# Altium PCB esp32门锁.PcbDoc
Units mil, origin at the board's own origin, x right, y up, seen from the top; angles counter-clockwise.
Board outline 1968.27 x 1924.63 mil, 2 copper layers (Top Layer, Bottom Layer); 39 components, 54 nets, 195 pads, 54 vias.
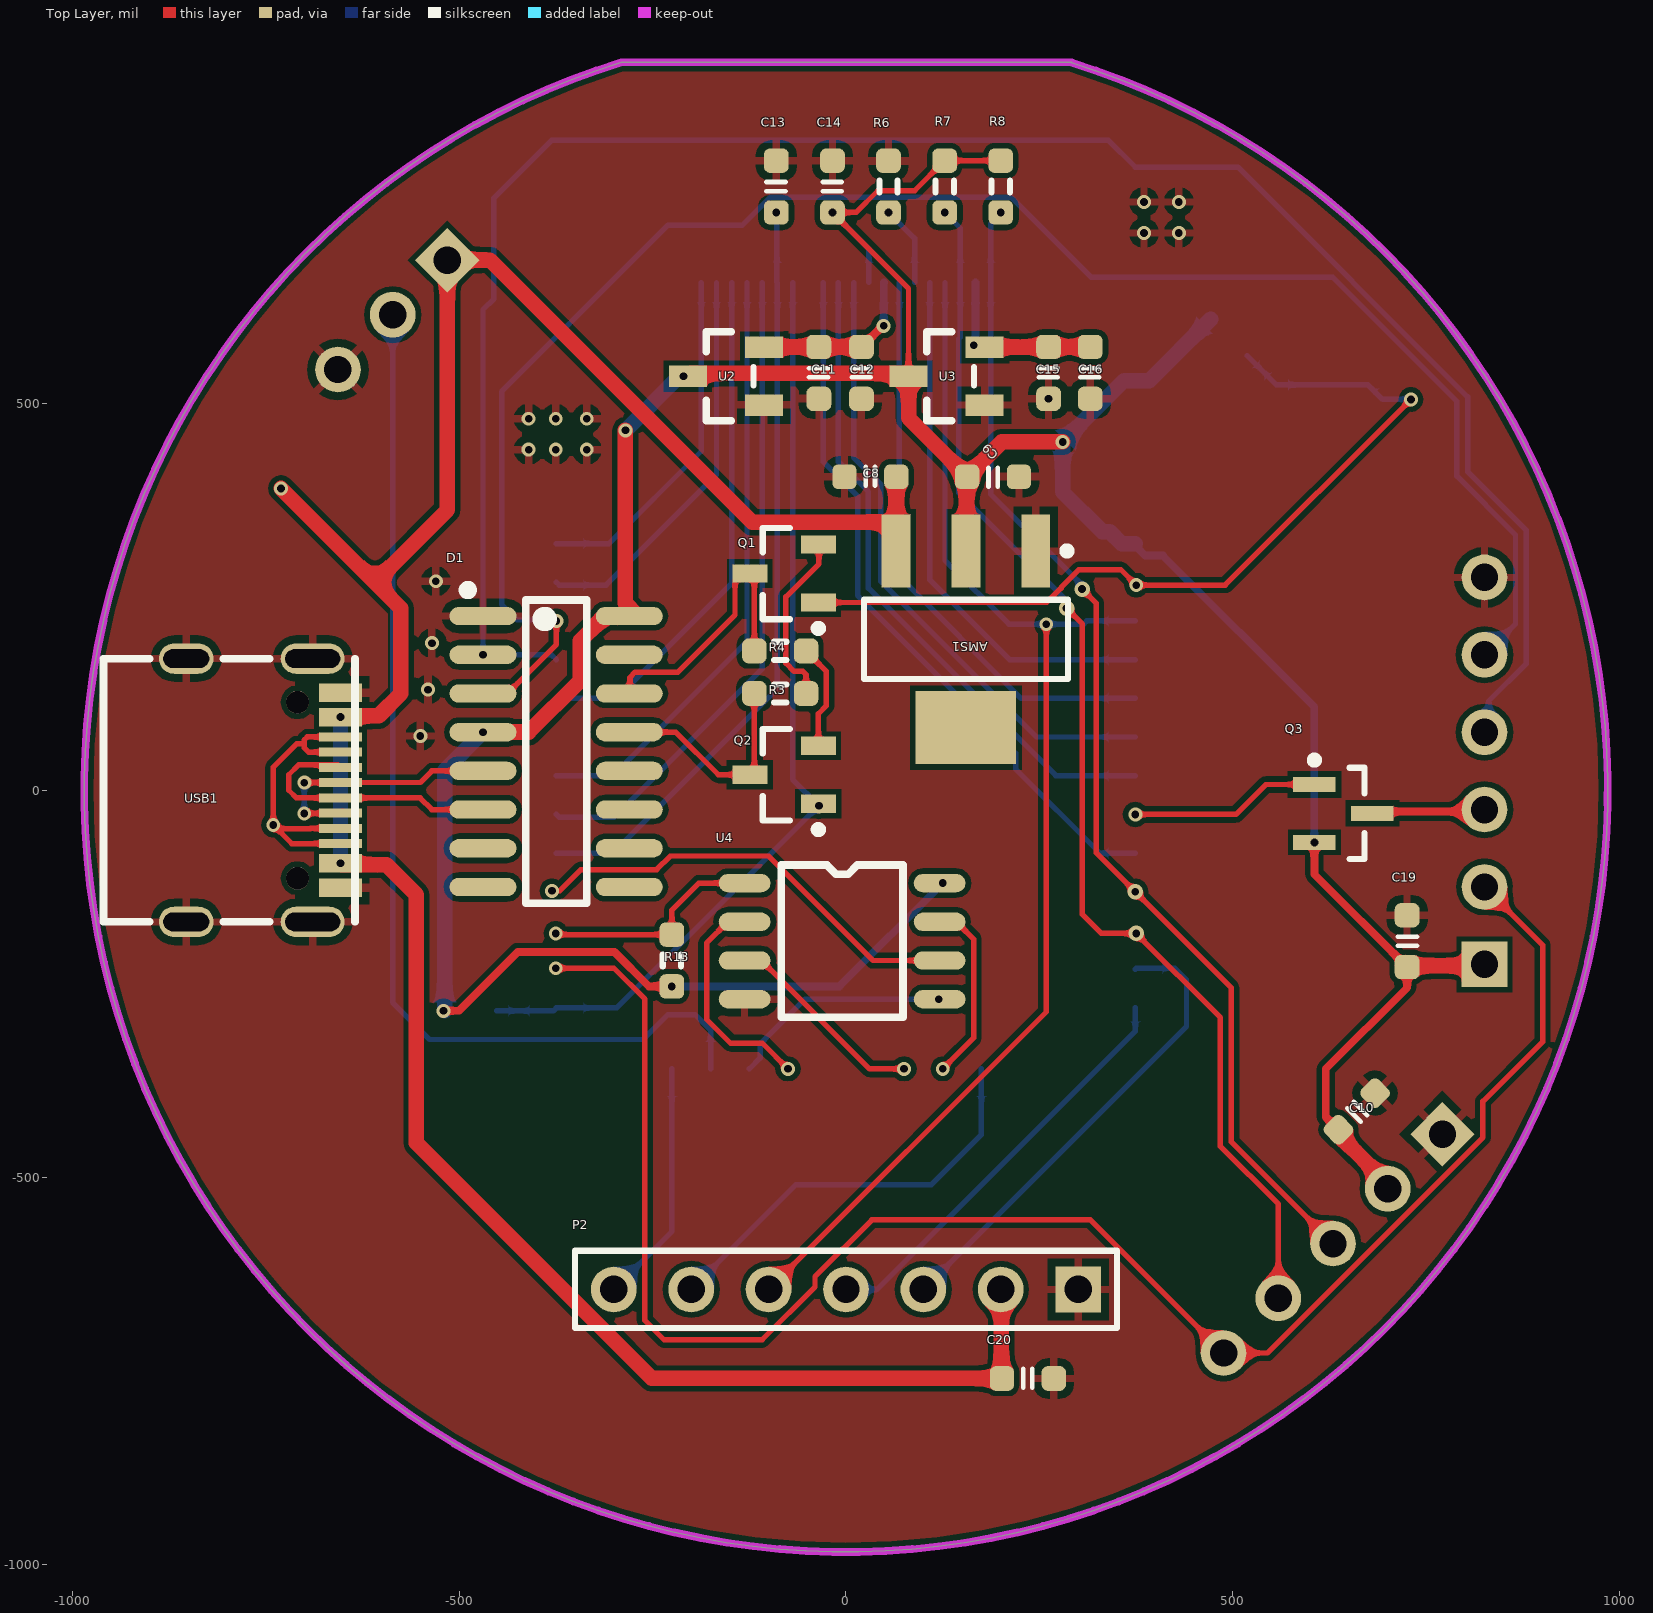
[diagram p0: Top Layer view]
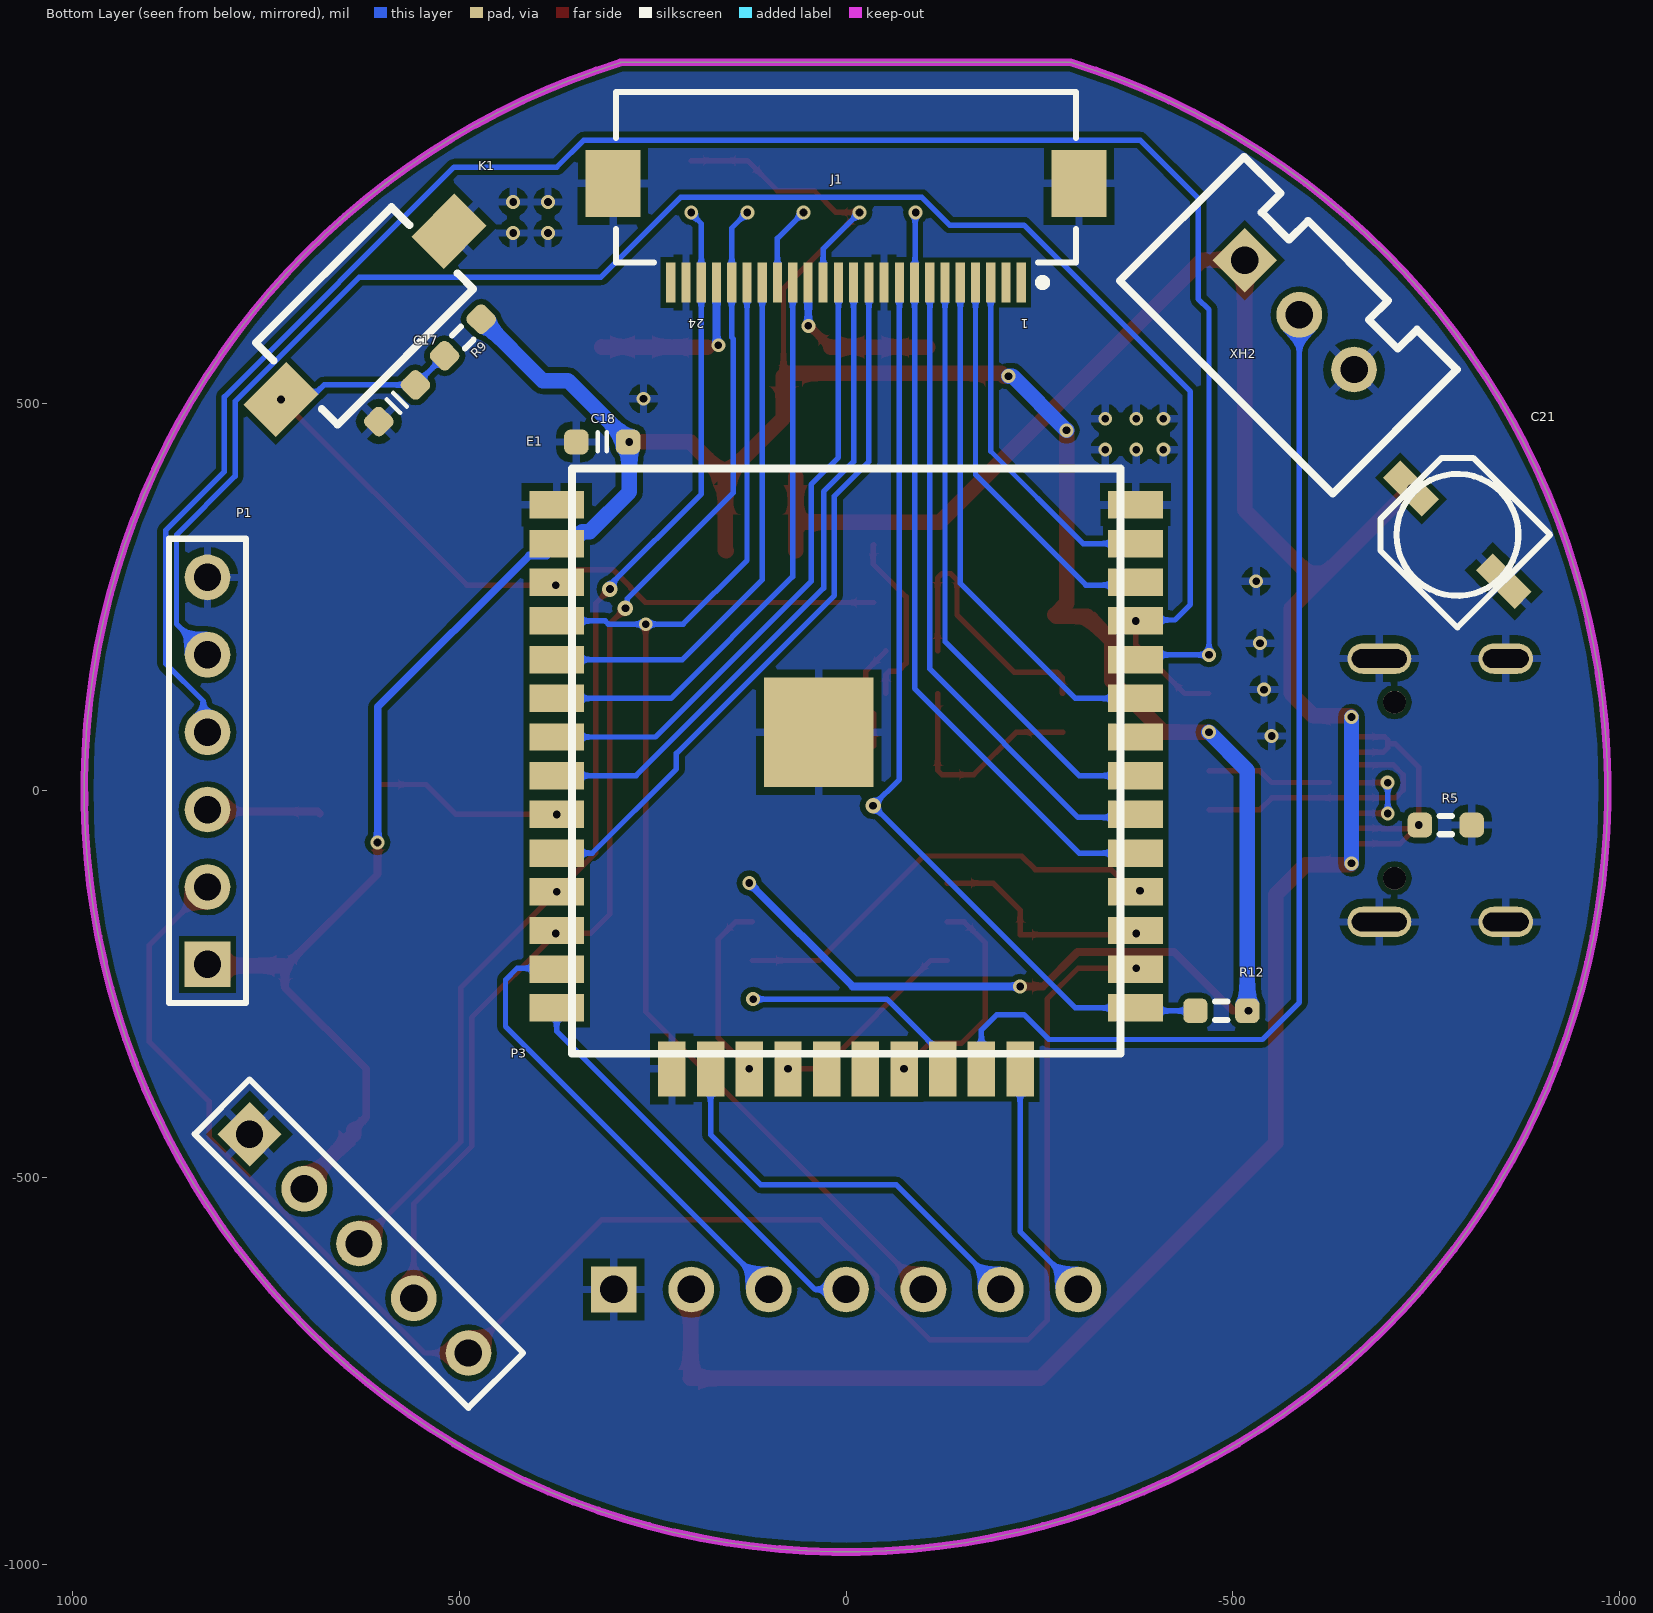
[diagram p1: Bottom Layer view, seen from below]

## Layer stack, top to bottom
Top Solder: solder mask 0.4, Solder Resist, Dk 3.5
Top Layer: signal copper 1.4
Dielectric 1: dielectric 12.6, FR-4, Dk 4.8
Bottom Layer: signal copper 1.4
Bottom Solder: solder mask 0.4, Solder Resist, Dk 3.5

## Board outline
-290.16,940.51 ccw(c0,0) 291.81,940 291.3,940.51

## Design rules (kind name [scope] priority, off if disabled: settings)
Clearance [All] p1: gap=7 ignorepadtopadclearanceinfootprint=TRUE
HoleSize [All] p1: absolutevalues=TRUE maxlimit=158 minlimit=1 maxpercent=80.000 minpercent=20.000
MinimumSolderMaskSliver [All] p1: minsoldermaskwidth=7
PolygonConnect [All] p1: connectstyle=Relief reliefconductorwidth=10 reliefentries=4 polygonreliefangle="90 Angle" airgapwidth=10
RoutingVias [All] p1: holewidth=10 width=20 viastyle="Through Hole" minholewidth=9 minwidth=18 maxholewidth=118.11 maxwidth=118.11
SilkToSilkClearance [All] p1: silktosilkclearance=0
SilkToSolderMaskClearance [IsPad] p1: minsilkscreentomaskgap=0 clearancetoexposedcopper=FALSE
SolderMaskExpansion [All] p1: expansion=0 soldermaskfromhole=TRUE
Width pwr [InNetClass('pwr')] p1: maxlimit=20 minlimit=7 preferedwidth=15
Width [All] p2: maxlimit=10 minlimit=6 preferedwidth=6
26 further rules are at their usual default settings.

## Classes and differential pairs
net class pwr: 1V5 2V8 3V3 BAT NetDS2_1 OUT2 TP VBUS VIN2

## Components (designator, comment, footprint, x,y, rotation, side; value= is the part's Value field where it differs from the comment)
AMS1 "AMS11173.3v" SOT223 155,195 r270 top
C8 "1uf" C0603 31.54,405 r0 top
C9 "1uf" C0603 190,405 r180 top
C10 "100nf" C0603 660,-415 r225 top
C11 "1UF" C0603 -35,539.27 r90 top
C12 "100nf" C0603 20,539.27 r90 top
C13 "15pf" C0603 -90,780 r90 top
C14 "0.1uf" C0603 -17.5,780 r90 top
C15 "1UF" C0603 261.81,539.27 r90 top
C16 "100nf" C0603 315.61,539.27 r90 top
C17 "0.1uF" C0603 580,500 r135 bottom value=0.1uf
C18 "0.1uf" C0603 315,450 r180 bottom
C19 "1uf" C0603 725,-195 r270 top
C20 "1uf" C0603 235,-760 r0 top
C21 "10uf" C4X4 -790,330 r225 bottom
D1 "CH340C" CH340C -374.49,50 r0 top
E1 "esp32wroom32" esp32U 354.13,-340.32 r180 bottom
J1 "CL586-0521-0" FH12-24S-0.5SH 0,720 r0 bottom
K1 "Key-PB" KEY-SMD1 730,505 r135 bottom
P1 "TOUCH" HDR1X6 825,-225 r90 bottom
P2 "ips" HDR1X7 300,-645 r180 top
P3 "PN532" HDR1X5 770.71,-444.29 r225 bottom
Q1 "QNPN" SOT-23B_N -80,280 r180 top
Q2 "QNPN" SOT-23B_N -80,20 r180 top
Q3 "NMOS" SOT23 642.6,-30 r0 top
R3 "5.1K" R0603 -85,125 r180 top
R4 "5.1K" R0603 -85,180 r180 top
R5 "5.1K" R0603 -775,-45 r0 bottom
R6 "1k" R0603 55,780 r90 top
R7 "2K" R0603 127.5,780 r270 top
R8 "2K" R0603 200,780 r270 top
R9 "10K" R0603 495,585 r135 bottom
R12 "10K" R0603 -485,-285 r180 bottom
R13 "10K" R0603 -225,-220 r90 top
U2 "XC6206P152MR" SOT23-3 -155,535 r0 top
U3 "XC6206P282MR" SOT23-3 130,535 r0 top
U4 "PSRAM" PSRAM -5,-195 r0 top
USB1 "typec" USB-C-SMD_TYPE-C16PIN -795,0 r270 top
XH2 "XH3P-2.54" XH2.54-3 -515,685 r225 bottom

## Footprints (in the part's own frame and the unit in brackets; to place one, negate y for a bottom-side part, rotate by r counter-clockwise, add the part's x,y. Pads: shape width x height; smd on the part's side, far side on the other; paste and mask are expansions set on the pad)
C4X4 [mm]
  rect 1.8x0.8 smd: 1(-2.15,0) 2(2.15,0)
  silkscreen extent -2.15,-2.15 2.15,2.15, body extent -2.29,-2.16 2.31,2.14, height 5.2
C0603 [mm] "C0603瓷片电容"
  rrect50% 0.8x0.813 smd: 1(-0.85,0) 2(0.85,0)
  silkscreen extent -0.15,-0.3 0.15,0.33, body extent -0.76,-0.38 0.76,0.38, height 0.76
CH340C [mm]
  oval 2.2x0.6 smd: 1(-2.4,4.445) 2(-2.4,3.175) 3(-2.4,1.905) 4(-2.4,0.635) 5(-2.4,-0.635) 6(-2.4,-1.905) 7(-2.4,-3.175) 8(-2.4,-4.445) 9(2.4,-4.445) 10(2.4,-3.175) 11(2.4,-1.905) 12(2.4,-0.635) 13(2.4,0.635) 14(2.4,1.905) 15(2.4,3.175) 16(2.4,4.445)
  silkscreen extent -3.05,-4.97 1,5.45, body extent -3.02,-4.97 2.98,5.03, height 1.75
esp32U [mm]
  rect 1.8x0.9 smd: 1(-0.5,18.01) 2(-0.5,16.74) 3(-0.5,15.47) 4(-0.5,14.2) 5(-0.5,12.93) 6(-0.5,11.66) 7(-0.5,10.39) 8(-0.5,9.12) 9(-0.5,7.85) 10(-0.5,6.58) 11(-0.5,5.31) 12(-0.5,4.04) 13(-0.5,2.77) 14(-0.5,1.5) 25(18.5,1.5) 26(18.5,2.77) 27(18.5,4.04) 28(18.5,5.31) 29(18.5,6.58) 30(18.5,7.85) 31(18.5,9.12) 32(18.5,10.39) 33(18.5,11.66) 34(18.5,12.93) 35(18.5,14.2) 36(18.5,15.47) 37(18.5,16.74) 38(18.5,18.01)
  rect 0.9x1.8 smd: 15(3.28,-0.5) 16(4.55,-0.5) 17(5.82,-0.5) 18(7.09,-0.5) 19(8.36,-0.5) 20(9.63,-0.5) 21(10.9,-0.5) 22(12.17,-0.5) 23(13.44,-0.5) 24(14.71,-0.5)
  rect 3.6x3.6 smd: 39(8.1,10.55)
  silkscreen extent 0,0 18,19.2
FH12-24S-0.5SH [mm] "Connector; FH12 Series; 24 Position; 0.5mm Spaced Bottom Contact"
  rect 0.3x1.3 smd: 1(-5.75,1.625) 2(-5.25,1.625) 3(-4.75,1.625) 4(-4.25,1.625) 5(-3.75,1.625) 6(-3.25,1.625) 7(-2.75,1.625) 8(-2.25,1.625) 9(-1.75,1.625) 10(-1.25,1.625) 11(-0.75,1.625) 12(-0.25,1.625) 13(0.25,1.625) 14(0.75,1.625) 15(1.25,1.625) 16(1.75,1.625) 17(2.25,1.625) 18(2.75,1.625) 19(3.25,1.625) 20(3.75,1.625) 21(4.25,1.625) 22(4.75,1.625) 23(5.25,1.625) 24(5.75,1.625)
  rect 1.8x2.2 smd: 25(-7.65,-1.625) 26(7.65,-1.625)
  silkscreen extent -7.55,-4.62 7.55,1.75
HDR1X5 [mm] "Connector; Header; 5 Position"
  rect 1.5x1.5 hole 0.9: 1(0,0)
  round 1.5 hole 0.9: 2(2.54,0) 3(5.08,0) 4(7.62,0) 5(10.16,0)
  silkscreen extent -1.27,-1.27 11.43,1.27
HDR1X6 [mm] "Connector; Header; 6 Position"
  rect 1.5x1.5 hole 0.9: 1(0,0)
  round 1.5 hole 0.9: 2(2.54,0) 3(5.08,0) 4(7.62,0) 5(10.16,0) 6(12.7,0)
  silkscreen extent -1.27,-1.27 13.97,1.27
HDR1X7 [mm] "Connector; Header; 7 Position"
  rect 1.5x1.5 hole 0.9: 1(0,0)
  round 1.5 hole 0.9: 2(2.54,0) 3(5.08,0) 4(7.62,0) 5(10.16,0) 6(12.7,0) 7(15.24,0)
  silkscreen extent -1.27,-1.27 16.51,1.27
KEY-SMD1 [mm]
  rect 2x1.5 smd: 1(0,0) 2(7.8,0)
  silkscreen extent 0.73,-1.9 7.03,1.9, body extent -0.06,-1.94 7.83,1.9, height 2.5
PSRAM [mm] "SOP8"
  oval 1.7x0.6 smd: 1(-3.2,1.905) 2(-3.2,0.635) 3(-3.2,-0.635) 4(-3.2,-1.905) 5(3.2,-1.905) 6(3.2,-0.635) 7(3.2,0.635) 8(3.2,1.905)
  silkscreen extent -2,-2.5 2,2.5
R0603 [mm] "0603电阻"
  rrect50% 0.8x0.813 smd: 1(-0.85,0) 2(0.85,0)
  silkscreen extent -0.2,-0.3 0.2,0.3, body extent -0.76,-0.38 0.76,0.38, height 0.76
SOT23 [mm] "SOT23, 3-Leads, Body 3.0x2.5mm (max), Pitch 0.95mm, IPC Medium Density"
  rect 1.4x0.5 smd: 1(-0.95,0.95) 2(-0.95,-0.95) 3(0.95,0)
  silkscreen extent -1.07,-1.5 0.7,1.87, body extent -1.4,-1.45 1.4,1.45, height 1.29
SOT23-3 [mm]
  rect 1.25x0.7 smd: 1(1.25,-0.95) 2(-1.25,0) 3(1.25,0.95)
  silkscreen extent -0.65,-1.46 0.9,1.46, body extent -1.5,-1.5 1.5,1.5, height 1.3
SOT223 [mm] "SOT223, 4-Leads, Body 6.7x7.3mm (max), Pitch 2.29mm, IPC Medium Density"
  rect 2.4x0.95 smd: 1(-2.9,2.29) 2(-2.9,0) 3(-2.9,-2.29)
  rect 2.4x3.3 smd: 4(2.9,0)
  silkscreen extent -3.02,-3.35 1.3,3.44, body extent -3.65,-3.35 3.65,3.35, height 1.8
SOT-23B_N [mm] "SOT23, 3-Leads, Body 2.9x1.3mm, Pitch 0.95mm, Lead Span 2.4mm, IPC Medium Density"
  rect 1.15x0.6 smd: 1(-1.125,0.95) 2(-1.125,-0.95) 3(1.125,0)
  silkscreen extent -1.25,-1.5 0.7,1.92, body extent -0.7,-1.5 0.7,1.5, height 1.14
USB-C-SMD_TYPE-C16PIN [mm]
  rect 0.6x1.4 smd: A1B12(-3.2,3.604) A4B9(-2.4,3.604) B1A12(3.2,3.604) B4A9(2.4,3.604)
  rect 0.3x1.4 smd: A5(-1.25,3.604) A6(-0.25,3.604) A7(0.25,3.604) A8(1.25,3.604) B5(1.75,3.604) B6(0.75,3.604) B7(-0.75,3.604) B8(-1.75,3.604)
  oval 1x2.1 hole 0.61 slot 1.8 at 90 deg: S(-4.32,2.691) S(4.32,2.691)
  oval 1x1.8 hole 0.61 slot 1.5 at 90 deg: S(-4.32,-1.459) S(4.32,-1.459)
  round 0.75 hole 0.75 unplated: ""(-2.89,2.191) ""(2.89,2.191)
  silkscreen extent -4.32,-4.18 4.32,4.08
XH2.54-3 [mm]
  rect 1.5x1.5 hole 0.9: 1(0,0)
  round 1.5 hole 0.9: 2(2.54,0) 3(5.08,0)
  silkscreen extent -2.41,-3.38 7.47,2.39, body extent -2.41,-3.41 7.49,2.34, height 7

## Part data
AMS1: library part AMS1117, "Power"
C8 C9 C10 C11 C12 C13 C14 C15 C16 C17 C18 C19 C20: library part CAP, "无极电容", accuracy=20%
C21: library part CAP-Pole_1, "电解电容"
D1: library part ch340c
E1: library part esp32
J1: "FH12 Series, \"Flip-Lock\" SMT/ZIF Connector - 0.5mm Spaced Bottom Contact", Current=0.4A, PackageDocument=13-Nov-2000, ComponentLink1Description="Manufacturer Link", ComponentLink1URL=http://www.hiroseusa.com/, ComponentLink2Description=Datasheet, ComponentLink2URL=http://www.hirose.co.jp/cataloge_hp/e58605370.pdf, ContactMaterial="Phosphor Bronze", DatasheetDocument=13-Nov-2000, PackageReference=FH12-24S-0.5SH, PadDimensions="Follow nominal values, Suitable for Wave Soldering, Adjust for Re-flow.", PCB_Layout="Complies with manufacturer's recommendation.", Positions=24, Published=17-Jul-2002, Publisher="Altium Limited"
K1: "轻触开关"
P1: library part "Header 6", "Header, 6-Pin", LatestRevisionDate=17-Jul-2002, LatestRevisionNote="Re-released for DXP Platform.", Publisher="Altium Limited"
P2: library part "Header 7", "Header, 7-Pin", LatestRevisionDate=17-Jul-2002, LatestRevisionNote="Re-released for DXP Platform.", Publisher="Altium Limited"
P3: library part "Header 5", "Header, 5-Pin", LatestRevisionDate=17-Jul-2002, LatestRevisionNote="Re-released for DXP Platform.", Publisher="Altium Limited"
Q1 Q2: "NPN Bipolar Transistor", LatestRevisionDate=29-May-2009, LatestRevisionNote="IPC-7351 Footprint Added.", PackageDescription="3-Pin SOT-23 Package 0.95 mm Pitch, 2.4 mm Lead Span", PackageReference=SOT-23B, PackageVersion=Aug-1999, Published=8-Jun-2000, Publisher="Altium Limited"
Q3: library part NOMS, "HEXFET Power MOSFET", ComponentLink1Description="Manufacturer Link", ComponentLink1URL=http://www.irf.com/, DatasheetDocument=May-1998, LatestRevisionDate=17-Jul-2002, LatestRevisionNote="Re-released for DXP Platform.", PackageReference=D2PAK, Published=8-Jun-2000, Publisher="Altium Limited"
R3 R4 R5 R6 R7 R8 R9 R12 R13: library part RES, "电阻"
U2 U3: library part XC6206, "LDO,SOT23,1.2~5.0V"
USB1: library part typec16p四脚插板
XH2: "XH2.54小白头"

## Via types
v1: diameter 18, hole 10, Top Layer to Bottom Layer, 49 vias
v2: diameter 20, hole 10, Top Layer to Bottom Layer, 5 vias

## Nets (pads, with @x,y where several pads share a name; then routed paths per layer and width w, separated by ;. In a path a pad name is that pad's centre, name@x,y a point inside that pad or via, vN(x,y) a via of type N, cw(c..) or ccw(c..) an arc to the next point about the centre after c; other vN are vias at no path point)
1V5: C11.2 C12.2 J1.15 U2.3 | length 223.5
  Top Layer w10: C12.2 47.27,600 v1(48.63,600) v1@50,600
  Top Layer w20: U2.3 -105.62,572.57 19.83,572.57 C12.2
  Bottom Layer w10: v1(48.63,600) 48.92,600.29 48.92,655.73 J1.15
2V8: C15.2 C16.2 J1.21 U3.3 | length 218.5
  Top Layer w20: U3.3 179.38,572.57 315.44,572.57 C16.2
  Bottom Layer w10: v1(165,575) 165,577.16 167.32,579.49 J1.21
3V3: AMS1.2 C9.2 C10.2 C14.1 C18.2 C19.2 D1.4 D1.16 E1.2 J1.14 P1.1 P3.2 Q3.2 R7.1 R8.1 R9.2 R12.2 R13.1 U2.2 U3.2 U4.8 | length 4675.8
  Top Layer w7: U3.2 80.79,648.25 v1(-17.5,746.54) 13.01,746.54 41.05,774.57 88.61,774.57 R7.1 R8.1
  Top Layer w10: v1(-520,-285) -500,-285 -424,-209 -299.08,-209 -254.62,-253.46 v1(-225,-253.46) ; v1(605.2,-67.4) 605.2,-108.66 C19.2 725,-255 620,-360 620,-422.33 C10.2
  Top Layer w20: v1(-468.98,75) -410,75 -343.59,141.41 -343.59,192.9 -311.5,225 D1.16 -271.67,225 -270,226.67 -285,241.67 v1(-285,465) ; U2.2 -200.66,538.55 77.24,538.55 U3.2 80.79,481 C9.2@156.54,405.26 ; AMS1.2 155.77,309.94 155.77,404.23 C9.2 C9.2@156.54,405.26 ; v1(280,450) 201.28,450 C9.2@156.54,405.26 ; C10.2 636.34,-445 700,-508.66 P3.2 ; C19.2 726.73,-226.73 823.27,-226.73 P1.1
  Bottom Layer w7: v1(-17.5,746.54) 29.53,699.51 J1.14
  Bottom Layer w10: v1(-225,-253.46) -8.46,-253.46 v1(125,-120) ; E1.2@375,315 386.79,303.21 409.47,303.21 605,107.68 v1@605,-67.4
  Bottom Layer w20: R12.2 -518.46,25.51 v1(-468.98,75) ; v1(-285,465) -215,535 v1(-210,535) ; E1.2 356.1,318.74 340.82,334.02 331.34,334.02 280,385.37 v1(280,450) 359.24,529.24 391.91,529.24 R9.2
BAT: 
cc1: R5.2 USB1.A5 USB1.A8 USB1.B5 USB1.B8 | length 420.7
  Top Layer w7: USB1.B5 -716.1,-68.9 v1(-740,-45) ; USB1.A8 -691.63,-49.21 -691.92,-49.5 -732.52,-49.5 -737.02,-45 v1(-740,-45) ; USB1.A5 -694.21,49.21 -700,55 -700,60 ; USB1.B8 -695.9,68.9 -700,64.8 -700,60 ; v1(-740,-45) -740,30 -710,60 -700,60
DTR#: D1.13 Q2.3 R3.2 | length 285.9
  Top Layer w7: D1.13 -220,75 -165,20 Q2.3 -118.46,25.83 R3.2
DVP_D0: E1.31 J1.6 | length 782
  Bottom Layer w7: E1.31 -301.26,18.74 -127.95,192.05 J1.6
DVP_D1: E1.36 J1.4 | length 515.9
  Bottom Layer w7: E1.36 -370.47,265 -310,265 -167.32,407.68 J1.4
DVP_D2: E1.37 J1.3 | length 454.6
  Bottom Layer w7: E1.37 -306.26,318.74 -187.01,437.99 J1.3
DVP_D3: E1.33 J1.5 | length 676.8
  Bottom Layer w7: E1.33 -296.26,118.74 -147.64,267.36 J1.5
DVP_D4: E1.30 J1.7 | length 846.2
  Bottom Layer w7: E1.30 -370.47,-35 -300,-35 -108.27,156.73 J1.7
DVP_D5: E1.25 J1.9 Q2.1 R12.1 | length 1216.4
  Bottom Layer w7: R12.1 -377.95,-285 E1.25 -296.26,-281.26 v2(-35,-20) -68.9,13.9 J1.9
DVP_D6: E1.10 J1.11 | length 931.3
  Bottom Layer w7: J1.11 -29.53,424.53 15,380 15,251.86 219.17,47.69 219.17,27.46 327.89,-81.26 E1.10
DVP_D7: E1.7 J1.13 | length 812.8
  Bottom Layer w7: J1.13 9.84,430.16 45,395 45,270 246.26,68.74 E1.7
DVP_HSYNC: E1.6 J1.16 | length 750
  Bottom Layer w7: J1.16 68.9,276.1 226.26,118.74 E1.6
DVP_PCLK: C13.1 E1.29 J1.8 | length 989.4
  Bottom Layer w7: E1.29 -301.26,-81.26 -88.58,131.42 J1.8 -89.29,656.73 -89.29,745.83 v1(-90,746.54)
DVP_RST: E1.4 J1.19 P2.5 | length 1648.9
  Top Layer w7: P2.5 258.79,-286.21 v1(258.79,214.5)
  Bottom Layer w7: J1.19 127.95,297.05 210.5,214.5 v1(258.79,214.5) 307.08,214.5 311.32,218.74 E1.4
DVP_SCL: E1.12 J1.20 P3.4 R7.2 | length 1609.6
  Top Layer w7: v2(285,235) 305.5,214.5 305.5,-160.5 330,-185 v2(375,-185) 483.82,-293.82 483.82,-460.04 558.58,-534.8 P3.4
  Bottom Layer w7: v1(127.5,746.54) 147.64,726.4 147.64,585.21 145.5,583.08 145.5,384.5 282.51,247.49 282.51,237.49 v2(285,235)
DVP_SDA: E1.11 J1.22 P3.3 R8.2 | length 1520.8
  Top Layer w7: v2(305,260) 323.17,241.83 323.17,-80.61 v2(373.82,-131.26) 497.82,-255.26 497.82,-454.24 P3.3
  Bottom Layer w7: v1(200,746.54) 200,744.94 187.01,731.95 187.01,382.99 305,265 v2(305,260)
DVP_VSYNC: E1.5 J1.18 | length 692.5
  Bottom Layer w7: J1.18 108.27,271.73 211.26,168.74 E1.5
DVP_XCLK: E1.8 J1.12 | length 856.3
  Bottom Layer w7: J1.12 -9.84,424.64 29,385.8 29,261 271.26,18.74 E1.8
E32_RST: C17.2 E1.3 K1.1 Q1.1 R9.1 | length 1126.1
  Top Layer w7: Q1.1 259.38,242.6 277.94,261.16 277.94,261.93 301.01,285 355,285 v1(375,265) 490,265 v1(730,505)
  Bottom Layer w7: R9.1 556.16,523.84 674.35,523.84 693.19,505 v1(730,505)
GND: AMS1.1 C8.1 C9.1 C10.1 C11.1 C12.1 C13.2 C14.2 C15.1 C16.1 C17.1 C18.1 C19.1 C20.2 C21.2 D1.1 E1.1 E1.15 E1.38 E1.39 J1.10 J1.23 J1.25 J1.26 K1.2 P1.6 P2.1 P3.1 R5.1 R6.2 U2.1 U3.1 U4.4 USB1.A1B12 USB1.B1A12 USB1.S XH2.3
  other v1: -550,70 -540,130 -535,190 -530,270 -410,440 -375,440 -335,440 -410,480 -375,480 -335,480 261.81,505.8 385,720 430,720 385,760 430,760
IO16: E1.27 R13.2 U4.1 | length 290.7
  Top Layer w7: v1(-375,-185) -373.46,-186.54 R13.2 -225,-155 -190,-120 U4.1
IPS_BLK: E1.24 P2.7 | length 316.1
  Bottom Layer w7: P2.7 -225,-570 E1.24
IPS_DC: E1.16 P2.6 | length 549.5
  Bottom Layer w7: P2.6@-200,-638.39 P2.6 -65,-510 110,-510 175,-445 E1.16
IPS_SCL: E1.13 P2.3 | length 613.7
  Bottom Layer w7: P2.3 440,-305 440,-245 425,-230 375.08,-230 E1.13
IPS_SDA: E1.14 P2.4 | length 542
  Bottom Layer w7: P2.4 40.03,-644.97 373.82,-311.18 E1.14
NetDS2_1: 
NetJ1_17: J1.17 R6.1 | length 104.4
  Bottom Layer w7: v1(55,746.54) 88.58,712.95 J1.17
NetLED1_1: 
NetLED2_1: 
NetLED2_2: 
NetQ1_2: Q1.2 R3.1 | length 228
  Top Layer w7: R3.1 -51.54,149.4 -55.64,153.5 -67.02,153.5 -77.78,164.26 -77.78,249.82 -35,292.61 -35,316.69 Q1.2
NetQ2_2: Q2.2 R4.1 | length 137.8
  Top Layer w7: R4.1 -51.54,179.74 -25.29,153.5 -25.29,109.26 -35.71,98.84 Q2.2
NetR2_2: 
OUT2: 
PN532_IRQ: E1.26 P1.2 P3.5 | length 2285.1
  Top Layer w7: v1(-375,-230) -300,-230 -259.97,-270.03 -259.97,-685.03 -235,-710 -108.39,-710 -40.03,-641.64 -40.03,-628.42 33.39,-555 315.74,-555 P3.5 544.48,-727.13 822.97,-448.64 822.97,-402.03 900,-325 900,-200 P1.2
PSRAM_CLK: E1.28 U4.6 | length 575.5
  Top Layer w7: v1(-380,-130) -370,-130 -342.69,-102.69 -244.64,-102.69 -226.95,-85 -100,-85 35,-220 U4.6
PWM: E1.23 XH2.2 | length 1390.7
  Bottom Layer w7: XH2.2 -585.71,-274.29 -537.9,-322.1 -262.1,-322.1 -230,-290 -195,-290 -175,-310 E1.23
PWM2: 
RTS#: D1.14 Q1.3 R4.2 | length 360.5
  Top Layer w7: D1.14 -279.29,125.71 -279.29,145.71 -272.31,152.69 -217.31,152.69 -143.43,226.57 -143.43,271.69 -135.12,280 Q1.3 -118.46,274.17 R4.2
SD0: E1.21 U4.2 | length 290.4
  Top Layer w7: U4.2 -152.64,-170 -180,-197.36 -180,-295.9 -149,-326.9 -108.1,-326.9 v1(-75,-360)
SD1: E1.22 U4.5 | length 292.8
  Bottom Layer w7: E1.22 -111.03,-346.03 -111.03,-328.03 -53,-270 v1(120,-270)
SD2: E1.17 U4.7 | length 237.4
  Top Layer w7: U4.7 142.64,-170 164.95,-192.31 164.95,-320.05 v1(125,-360)
SD3: E1.18 U4.3 | length 264
  Top Layer w7: U4.3 -109.33,-220 30.67,-360 v1(75,-360)
TOUCH_RX: D1.3 E1.35 P1.5 | length 2328.8
  Top Layer w7: D1.3 -437.48,125 -374.21,188.27 v1(-374.21,218.74)
  Bottom Layer w7: v1(-374.21,218.74) -375.47,220 -425,220 -445,240 -445,515 -229.83,730.17 -133.94,730.17 -98.08,766.04 213.75,766.04 316.86,662.92 628.68,662.92 789.22,502.39 789.22,405.78 865.03,329.97 865.03,215.03 P1.5
TOUCH_TX: D1.2 E1.34 P1.4 | length 2606.8
  Bottom Layer w7: E1.34 -380.47,175 v1(-468.98,175) -468.98,621.02 -455,635 -455,765 -380,840 338.75,840 373.75,805 506.41,805 803.22,508.19 803.22,411.58 879.03,335.77 879.03,163.57 830.48,115.03 830.48,80.48 P1.4
TP: P1.3 Q3.3 | length 147.1
  Top Layer w10: Q3.3 682.5,-27.5 822.5,-27.5 P1.3
TPC: E1.9 Q3.1 | length 247.4
  Top Layer w7: v1(373.82,-31.26) 503.74,-31.26 542.4,7.4 Q3.1
USBDM: D1.6 USB1.A7 USB1.B7 | length 354.9
  Top Layer w7: USB1.B7 -656.41,32.81 -707.19,32.81 -720,20 -720,0 -710.16,-9.84 USB1.A7 -550.16,-9.84 -535,-25 D1.6
USBDP: D1.5 USB1.A6 USB1.B6 | length 302.6
  Top Layer w7: v1(-700,-30) -699.76,-29.76 -653.36,-29.76 USB1.B6 USB1.B6@-650.72,-27.12 ; v1@-700,10 v1(-699.84,9.84) USB1.A6 USB1.A6@-650.72,7.44 ; -624.66,10 -550,10 -535,25 D1.5
  Bottom Layer w7: v1(-700,-30) -700,9.69 v1(-699.84,9.84)
VBUS: AMS1.3 C8.2 C20.1 C21.1 P2.2 USB1.A4B9 USB1.B4A9 XH2.1 | length 3346.1
  Top Layer w20: v1(-730,390) -608.57,268.57 ; v1(-653.13,-94.49) -651.32,-96.3 -593.7,-96.3 -555,-135 -555,-455.8 -250.8,-760 C20.1 200.77,-759.23 200.77,-645.77 P2.2 ; v1(-653.13,94.49) -651.32,96.3 -603.7,96.3 -575,125 -575,235 -608.57,268.57 ; C8.2 64.92,404.92 64.92,309.25 AMS1.3 64.84,337.72 56.14,346.42 -121.42,346.42 -460,685 XH2.1 -515,362.14 -608.57,268.57
  Bottom Layer w20: v1(-653.13,-94.49) v1(-653.13,94.49)
VIN2: 
pads on no net: AMS1.4 D1.7 D1.8 D1.9 D1.10 D1.11 D1.12 D1.15 E1.19 E1.20 E1.32 J1.1 J1.2 J1.24 USB1.

## Polygon pours and split planes (outlines as drawn)
GND on Top Layer "Top Layer-GND" (solid, remove dead copper, pour order 14): -1040,960 995,960 1165,790 1165,-685 885,-965 830,-980 -1025,-980
no net on Top Layer "Top Layer-No Net" (solid, pour order 4): -1265,1945
GND on Bottom Layer "Bottom Layer-GND" (solid, remove dead copper, pour order 12): -975,1000 1095.12,1000 1095.12,-750 840.12,-1005 -1024.88,-1005

## Keep-outs
Keep-Out Layer:
  lines w10: 290.16,940.51 cw(c0,0) -290.16,940.51 291.3,940.51

## Silkscreen, mask and mechanical layers (free items; w line width, h text height)
Mechanical 1:
  lines w10: 290.16,940.51 -290.16,940.51 ccw(c0,0) 291.81,940
Mechanical 13:
  lines w10: -291.57,940.07 ccw(c0,0) 294.72,939.09

## Text inside footprints (layer, text, board x,y; h text height)
J1: Bottom Overlay "24" at 183.07,612.72 h20 r180; Bottom Overlay "1" at -236.22,612.72 h20 r180